# Altium PCB IPMC_MACP 1.PcbDoc
Units mm, origin at the board's own origin, x right, y up, seen from the top; angles counter-clockwise.
Board outline 120.6 x 103.58 mm, 2 copper layers (Top Layer, Bottom Layer); 134 components, 87 nets, 498 pads, 24 vias.
Unrouted connection lines stored in the file: 334.
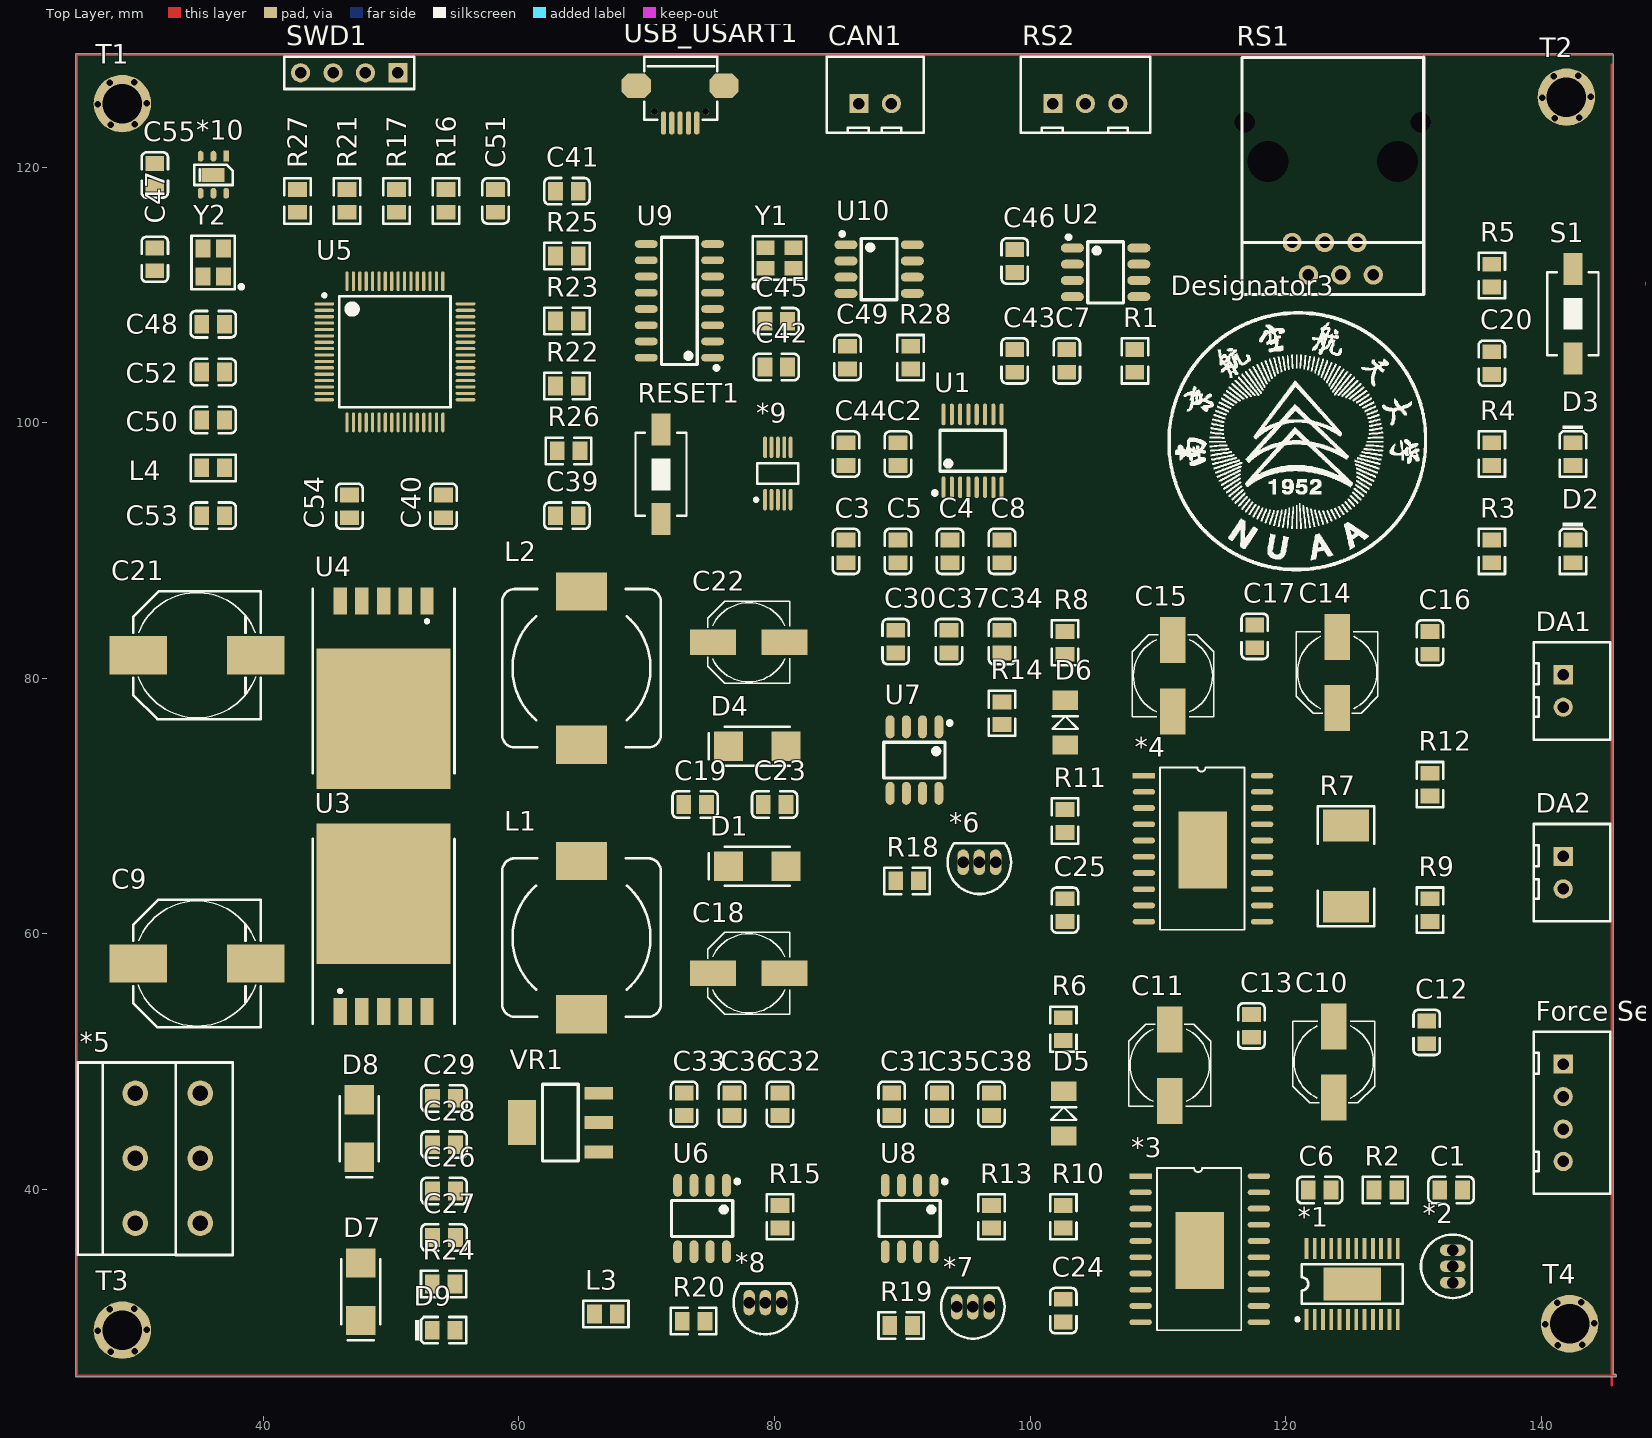
[diagram p0: Top Layer view]
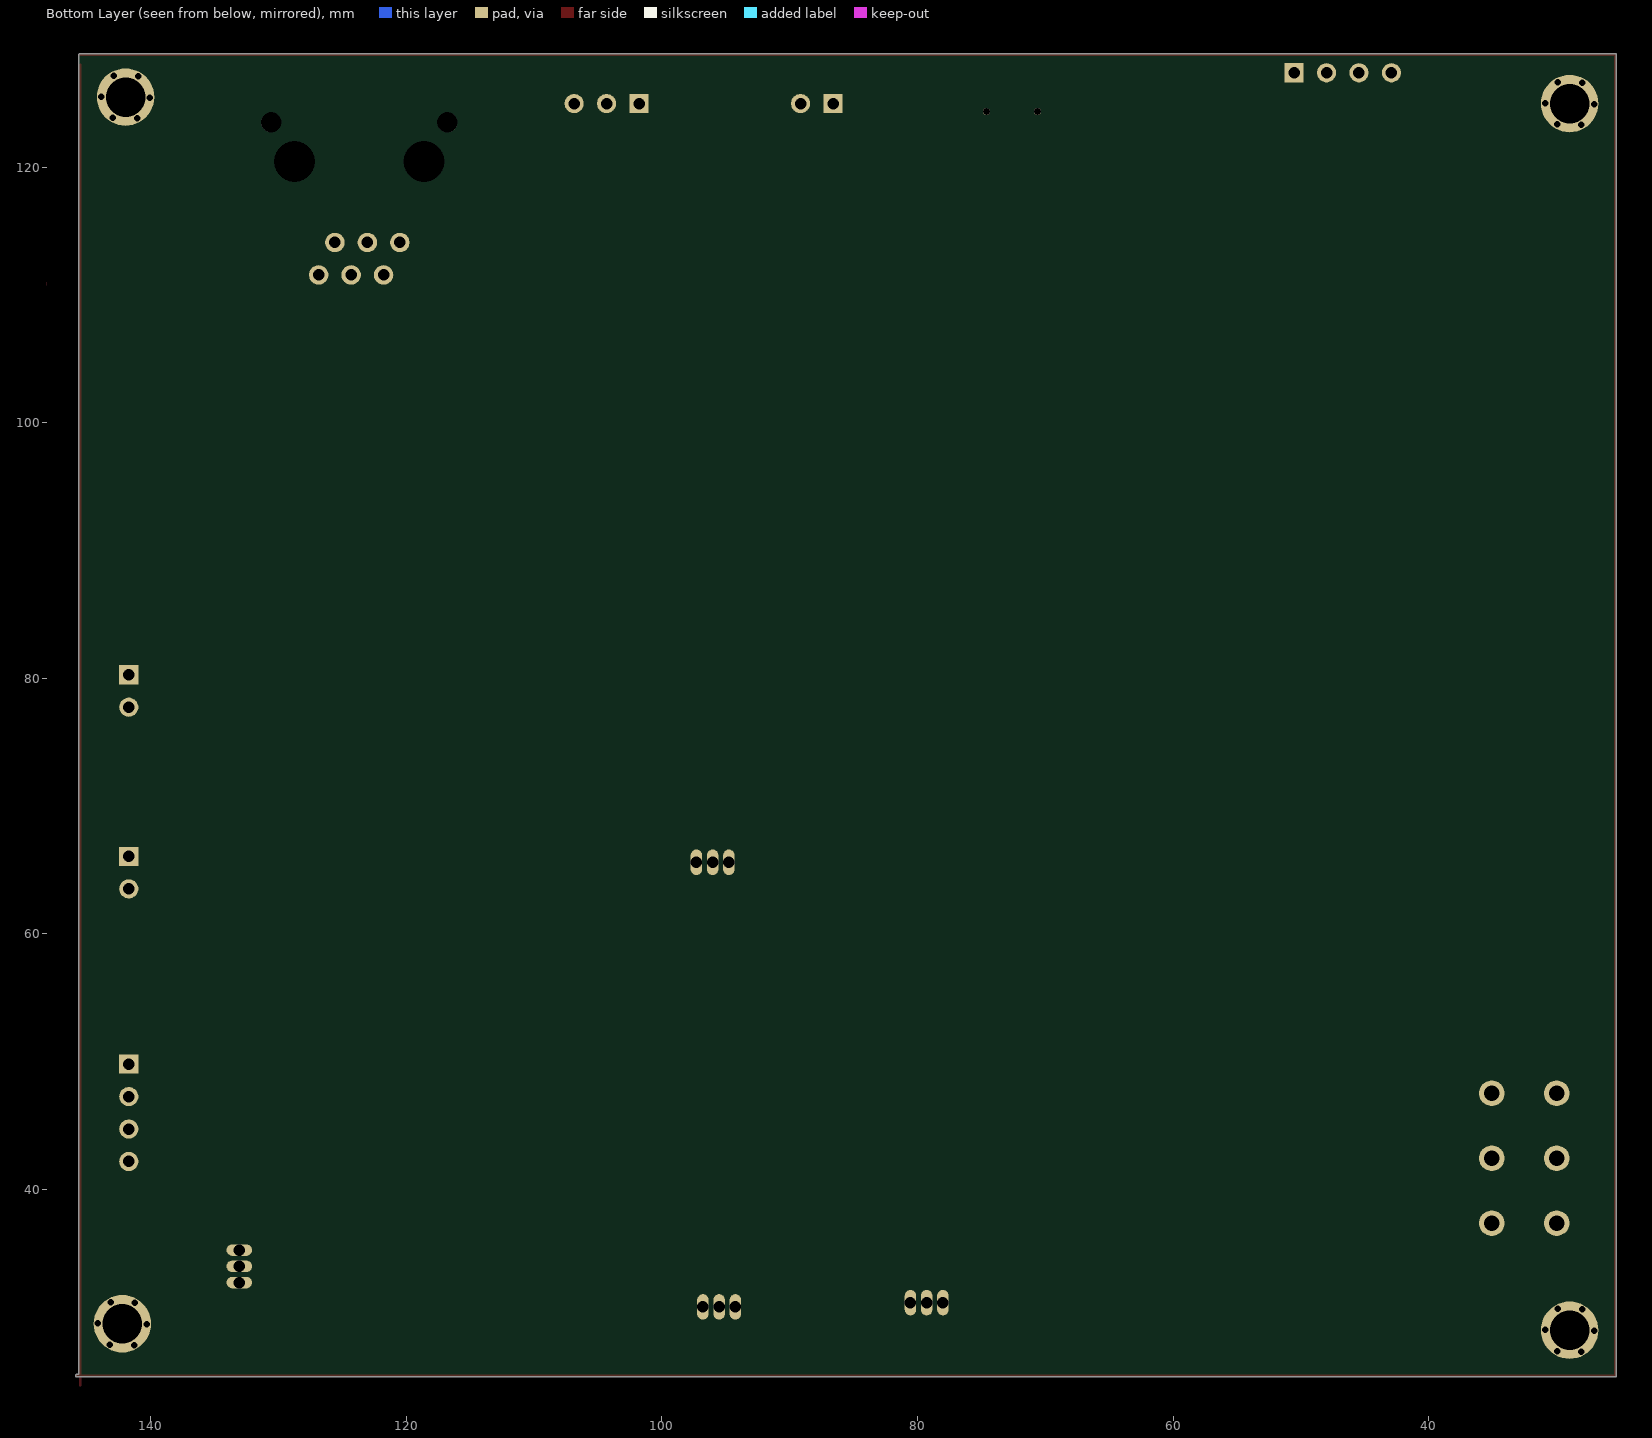
[diagram p1: Bottom Layer view, seen from below]

## Layer stack, top to bottom
Top Solder: solder mask 0.0102, Solder Resist, Dk 3.5
Top Layer: signal copper 0.0356
Dielectric 1: dielectric 0.32, FR-4, Dk 4.8
Bottom Layer: signal copper 0.0356
Bottom Solder: solder mask 0.0102, Solder Resist, Dk 3.5

## Board outline
25.4,25.298 cw(c25.4,25.4) 25.298,25.4 25.298,128.778 cw(c25.4,128.778) 25.4,128.88 145.542,128.88 cw(c145.542,128.778) 145.644,128.778 145.644,25.502 145.796,25.502 cw(c145.796,25.4) 145.898,25.4 cw(c145.796,25.4) 145.796,25.298

## Design rules (kind name [scope] priority, off if disabled: settings)
Clearance [All] p1: gap=0.178 ignorepadtopadclearanceinfootprint=FALSE
PolygonConnect [All] p1: connectstyle=Relief reliefconductorwidth=0.254 reliefentries=4 polygonreliefangle="90 Angle" airgapwidth=0.254
RoutingVias [All] p1: holewidth=0.711 width=1.27 viastyle="Through Hole" minholewidth=0.711 minwidth=1.27 maxholewidth=0.711 maxwidth=1.27
SolderMaskExpansion [All] p1: expansion=0.102
Width [All] p1: maxlimit=0.254 minlimit=0.254 preferedwidth=0.254
30 further rules are at their usual default settings.

## Components (designator, comment, footprint, x,y, rotation, side; value= is the part's Value field where it differs from the comment)
*1 "AD5722" TSSOP24P 125.211,32.58 r0 top
*2 "LM336" TO-92A 133.085,33.959 r0 top
*3 "OPA564AIDWP" HSOP20 108.661,41.019 r0 top
*4 "OPA564AIDWP" HSOP20 108.915,72.365 r0 top
*5 "KF301-3P" KF301-3P 29.972,37.338 r90 top
*6 "LM336" TO-92A 96.036,65.582 r90 top
*7 "LM336" TO-92A 95.528,30.784 r90 top
*8 "LM336" TO-92A 79.283,31.115 r90 top
*9 "ADS1115" MSOP-UN10_N 80.264,96.012 r90 top
*10 "SHT20" DFN6 35.103,117.983 r90 top
C1 "100nF" 0805_C 132.958,39.928 r180 top
C2 "100nF" 0805_C 89.669,97.536 r90 top
C3 "100nF" 0805_C 85.598,89.916 r270 top
C4 "100nF" 0805_C 93.74,89.916 r270 top
C5 "100nF" 0805_C 89.669,89.916 r270 top
C6 "100nF" 0805_C 122.671,39.928 r0 top
C7 "100nF" 0805_C 102.877,104.83 r270 top
C8 "100nF" 0805_C 97.81,89.916 r270 top
C9 "470uF/35V" C-RB-S10 34.798,57.658 r0 top
C10 "47uF/35V" C-RB-S6 123.784,49.951 r90 top
C11 "47uF/35V" C-RB-S6 110.935,49.697 r270 top
C12 "100nF" 0805_C 131.053,52.269 r270 top
C13 "100nF" 0805_C 117.337,52.777 r270 top
C14 "47uF/35V" C-RB-S6 124.038,80.441 r90 top
C15 "47uF/35V" C-RB-S6 111.189,80.187 r270 top
C16 "100nF" 0805_C 131.307,82.758 r270 top
C17 "100nF" 0805_C 117.591,83.266 r270 top
C18 "220uF/16V" C-RB-S6 77.989,56.896 r0 top
C19 "100nF" 0805_C 73.788,70.104 r180 top
C20 "100nF" 0805_C 136.144,104.648 r270 top
C21 "470uF/35V" C-RB-S10 34.798,81.788 r0 top
C22 "220uF/16V" C-RB-S6 77.989,82.804 r0 top
C23 "100nF" 0805_C 80.01,70.104 r180 top
C24 "1nF" 0805_C 102.605,30.495 r270 top
C25 "1nF" 0805_C 102.732,61.841 r90 top
C26 "10uF" 0805_C 54.132,39.846 r180 top
C27 "100nF" 0805_C 54.132,36.216 r180 top
C28 "10uF" 0805_C 54.132,43.476 r180 top
C29 "100nF" 0805_C 54.132,47.107 r180 top
C30 "100nF" 0805_C 89.492,82.854 r270 top
C31 "100nF" 0805_C 89.178,46.643 r270 top
C32 "100nF" 0805_C 80.426,46.643 r270 top
C33 "100nF" 0805_C 72.933,46.643 r270 top
C34 "100nF" 0805_C 97.81,82.854 r270 top
C35 "100nF" 0805_C 92.924,46.643 r270 top
C36 "100nF" 0805_C 76.679,46.643 r270 top
C37 "100nF" 0805_C 93.651,82.854 r270 top
C38 "100nF" 0805_C 96.977,46.643 r270 top
C39 "100nF" 0805_C 63.754,92.71 r0 top
C40 "2.2uF" 0805_C 54.102,93.445 r270 top
C41 "2.2uF" 0805_C 63.754,118.11 r0 top
C42 "100nF" 0805_C 80.137,104.349 r180 top
C43 "100nF" 0805_C 98.806,104.83 r90 top
C44 "100nF" 0805_C 85.598,97.536 r90 top
C45 "22pF" 0805_C 80.137,107.932 r180 top
C46 "22pF" 0805_C 98.806,112.649 r90 top
C47 "22pF" 0805_C 31.496,112.776 r90 top
C48 "22pF" 0805_C 36.068,107.696 r0 top
C49 "100nF" 0805_C 85.726,105.084 r270 top
C50 "100nF" 0805_C 36.068,100.203 r0 top
C51 "100nF" 0805_C 58.166,117.348 r270 top
C52 "100nF" 0805_C 36.068,103.949 r0 top
C53 "100nF" 0805_C 36.068,92.71 r180 top
C54 "100nF" 0805_C 46.736,93.445 r90 top
C55 "100nF" 0805_C 31.496,119.38 r90 top
CAN1 "Header 2" HDR2X1_B1 86.614,124.968 r0 top
D1 "1N5824" DIODE-SMA 80.899,65.278 r180 top
D2 "翠绿 0805" 0805_LED_S1 142.494,89.916 r270 top
D3 "红灯 0805" 0805_LED_S1 142.494,97.536 r270 top
D4 "1N5824" DIODE-SMA 80.899,74.676 r180 top
D5 "1N4732" DIODE-1206 102.638,44.162 r90 top
D6 "1N4732" DIODE-1206 102.765,74.767 r90 top
D7 "1N4001" DIODE-SMA 47.625,34.218 r270 top
D8 "1N4001" DIODE-SMA 47.498,46.99 r270 top
D9 "红灯 0805" 0805_LED_S1 54.102,28.956 r0 top
DA1 "Header 2" HDR2X1_B1 141.732,80.264 r270 top
DA2 "Header 2" HDR2X1_B1 141.732,66.04 r270 top
Designator3 "Comment" NUAA-LOGO 110.744,88.392 r0 top
"Force Sensor1" "Header 4" HDR4X1_B1 141.732,49.784 r270 top
L1 "33uH" L-SMD-12 64.897,59.69 r270 top
L2 "33uH" L-SMD-12 64.897,80.772 r90 top
L3 "10uH/磁珠" 0805_L 66.802,30.226 r0 top
L4 "10uH" 0805_L 36.068,96.456 r180 top
R1 "120Ω" 0805_R 108.204,104.83 r270 top
R2 "2.4KΩ" 0805_R 127.814,39.928 r0 top
R3 "1KΩ" 0805_R 136.144,89.916 r270 top
R4 "1KΩ" 0805_R 136.144,97.536 r270 top
R5 "10KΩ" 0805_R 136.144,111.506 r270 top
R6 "10KΩ" 0805_R 102.605,52.523 r90 top
R7 "10mR" 2512 124.734,65.278 r270 top
R8 "10KΩ" 0805_R 102.732,82.758 r90 top
R9 "10KΩ" 0805_R 131.307,61.841 r90 top
R10 "10KΩ" 0805_R 102.605,37.837 r270 top
R11 "10KΩ" 0805_R 102.732,68.813 r270 top
R12 "1KΩ" 0805_R 131.307,71.664 r90 top
R13 "0Ω" 0805_R 96.977,37.837 r270 top
R14 "200Ω" 0805_R 97.81,77.249 r270 top
R15 "1KΩ" 0805_R 80.426,37.837 r270 top
R16 "4.7KΩ" 0805_R 54.292,117.348 r90 top
R17 "4.7KΩ" 0805_R 50.419,117.348 r90 top
R18 "2.4KΩ" 0805_R 90.378,64.133 r0 top
R19 "2.4KΩ" 0805_R 89.913,29.335 r0 top
R20 "2.4KΩ" 0805_R 73.668,29.666 r0 top
R21 "4.7KΩ" 0805_R 46.545,117.348 r90 top
R22 "4.7KΩ" 0805_R 63.754,102.87 r0 top
R23 "4.7KΩ" 0805_R 63.754,107.95 r0 top
R24 "1KΩ" 0805_R 54.102,32.586 r0 top
R25 "4.7KΩ" 0805_R 63.754,113.03 r0 top
R26 "10KΩ" 0805_R 63.882,97.79 r180 top
R27 "10KΩ" 0805_R 42.672,117.348 r270 top
R28 "120Ω" 0805_R 90.659,105.084 r90 top
RESET1 "SW-PB" SW_PB2_A1 71.12,96.012 r180 top
RS1 "RJ11" RJ6-RJ11 123.698,114.095 r270 top
RS2 "Header 3" HDR3X1_B1 101.8,124.968 r0 top
S1 "SW-PB" SW_PB2_A1 142.494,108.458 r0 top
SWD1 "Header 4" HDR1X4 50.527,127.381 r180 top
T1 "M3铜柱螺丝孔" 螺丝孔-3MM 28.956,124.968 r0 top
T2 "M3铜柱螺丝孔" 螺丝孔-3MM 141.986,125.476 r0 top
T3 "M3铜柱螺丝孔" 螺丝孔-3MM 28.956,28.956 r0 top
T4 "M3铜柱螺丝孔" 螺丝孔-3MM 142.24,29.464 r0 top
U1 "SP3232EEY-L/TR" TSSOP-16 95.504,97.79 r0 top
U2 "SP3485EN-L/TR" SOIC-8_150mil 105.918,111.76 r270 top
U3 "LM2596S-5.0" TO-263-5 49.403,58.132 r0 top
U4 "LM2596S-5.0" TO-263-5 49.403,81.822 r180 top
U5 "STM32F405RGT6" STM-LQFP64_L 50.292,105.537 r0 top
U6 "AD620ARZ-REEL" SOIC-8_150mil 74.33,37.702 r180 top
U7 "AD620ARZ-REEL" SOIC-8_150mil 90.956,73.583 r180 top
U8 "AD620ARZ-REEL" SOIC-8_150mil 90.575,37.702 r180 top
U9 "CH340G" SOIC-16_150mil 72.563,109.526 r90 top
U10 "CAN/TJA1050T/CM" SOIC-8_150mil 88.192,112.014 r270 top
USB_USART1 "USB_M" USB_MICRO 75.152,125.095 r180 top
VR1 "AMS1117-3.3" SOT-223 63.246,45.212 r0 top
Y1 "12MHZ" SMD-3225_4P 80.398,112.879 r0 top
Y2 "25MHZ" SMD-3225_4P 36.068,112.522 r90 top

## Footprints (in the part's own frame and the unit in brackets; to place one, negate y for a bottom-side part, rotate by r counter-clockwise, add the part's x,y. Pads: shape width x height; smd on the part's side, far side on the other; paste and mask are expansions set on the pad)
0805_C [mm]
  rect 1.16x1.47 smd: 1(-0.89,0) 2(0.89,0)
  silkscreen extent -1.77,-1.04 1.77,1.04, body extent -1,-0.62 1,0.63, height 0.77
0805_L [mm]
  rect 1.16x1.47 smd: 1(-0.89,0) 2(0.89,0)
  silkscreen extent -1.77,-1.04 1.77,1.03, body extent -1.02,-0.64 1.03,0.64, height 0.6
0805_LED_S1 [mm]
  rect 1.16x1.47 smd: A(0.89,0) K(-0.89,0)
  silkscreen extent -2.25,-1.04 1.77,1.03, body extent -1.01,-0.62 1.01,0.62, height 1.1
0805_R [mm]
  rect 1.16x1.47 smd: 1(-0.89,0) 2(0.89,0)
  silkscreen extent -1.77,-1.04 1.77,1.03, body extent -1,-0.62 1,0.63, height 0.49
2512 [mm]
  rect 2.5x3.6 smd: 1(-3.175,0) 2(3.175,0)
  silkscreen extent -4.7,-2.2 4.7,2.2, body extent -3.18,-1.65 3.18,1.65, height 1.2
C-RB-S6 [mm] "贴片电解"
  rect 3.6x2 smd: 1(-2.794,0) 2(2.794,0)
  silkscreen extent -3.2,-3.2 3.2,3.2, body extent -3.15,-3.12 3.15,3.17, height 7.7
C-RB-S10 [mm] "贴片电解"
  rect 4.5x3 smd: 1(-4.6,0) 2(4.6,0)
  silkscreen extent -5,-5 5,5, body extent -4.97,-4.92 5.03,5.08, height 10
DFN6 [mm]
  rect 0.85x0.45 smd: 1(2.87,-1.981)
  rect 1.1x1.8 smd: 2(1.397,-0.965)
  oval 0.85x0.45 smd: 2(2.87,-0.981) 3(2.87,0.019) 4(-0.03,0.019) 5(-0.03,-0.981) 6(-0.03,-1.981)
  silkscreen extent 0.61,-2.48 2.2,0.52, body extent 0.19,-2.46 2.63,0.55, height 1
DIODE-1206 [mm] "玻璃封装二极管"
  rect 1.5x2 smd: 1(0,0) 2(3.5,0)
  silkscreen extent 1.25,-1 2.25,1
DIODE-SMA [mm] "贴片二极管"
  rect 2.3x2.3 smd: 1(0,0) 2(4.5,0)
  silkscreen extent -0.29,-1.52 6.06,1.52, body extent -0.67,-1.4 5.17,1.4, height 3
HDR1X4 [mm] "Connector; Header; 4 Position"
  rect 1.5x1.5 hole 0.9: 1(0,0)
  round 1.5 hole 0.9: 2(2.54,0) 3(5.08,0) 4(7.62,0)
  silkscreen extent -1.27,-1.27 8.89,1.27
HDR2X1_B1 [mm] "Connector; Header; 4 Position"
  rect 1.5x1.5 hole 0.9: 1(0,0)
  round 1.5 hole 0.9: 2(2.54,0)
  silkscreen extent -2.54,-2.29 5.08,3.68, body extent -2.41,-2.16 5.08,3.56, height 1.5
HDR3X1_B1 [mm] "Connector; Header; 3 Position"
  rect 1.5x1.5 hole 0.9: 1(0,0)
  round 1.5 hole 0.9: 2(2.54,0) 3(5.08,0)
  silkscreen extent -2.54,-2.29 7.62,3.68, body extent -2.54,-2.29 7.62,3.68, height 1.5
HDR4X1_B1 [mm] "Connector; Header; 4 Position"
  rect 1.5x1.5 hole 0.9: 1(0,0)
  round 1.5 hole 0.9: 2(2.54,0) 3(5.08,0) 4(7.62,0)
  silkscreen extent -2.54,-2.29 10.16,3.68, body extent -2.41,-2.16 10.03,3.56, height 1.5
HSOP20 [mm]
  rect 1.75x0.45 smd: 1(0,0)
  oval 1.75x0.45 smd: 2(0,-1.27) 3(0,-2.54) 4(0,-3.81) 5(0,-5.08) 6(0,-6.35) 7(0,-7.62) 8(0,-8.89) 9(0,-10.16) 10(0,-11.43) 11(9.254,-11.43) 12(9.254,-10.16) 13(9.254,-8.89) 14(9.254,-7.62) 15(9.254,-6.35) 16(9.254,-5.08) 17(9.254,-3.81) 18(9.254,-2.54) 19(9.254,-1.27) 20(9.254,0)
  rect 3.8x6 smd: ""(4.623,-5.817)
  silkscreen extent 1.27,-12.06 7.87,0.64, body extent 1.27,-12.06 7.87,0.64, height 0.25
KF301-3P [mm] "蓝色端子"
  round 2 hole 1.2: 1(0,0) 1(0,-5.08) 2(5.08,-5.08) 2(5.08,0) 3(10.16,-5.08) 3(10.16,0)
  silkscreen extent -2.49,-7.62 12.57,4.52
L-SMD-12 [mm] "贴片电感12*12"
  rect 3x4 smd: 1(-6,0) 2(6,0)
  silkscreen extent -6.2,-6.2 6.2,6.2, body extent -6.2,-6.22 6.2,6.17, height 2.5
MSOP-UN10_N [mm] "TSSOP"
  oval 1.7x0.3 smd: 1(-2.05,1) 2(-2.05,0.5) 3(-2.05,0) 4(-2.05,-0.5) 5(-2.05,-1) 6(2.05,-1) 7(2.05,-0.5) 8(2.05,0) 9(2.05,0.5) 10(2.05,1)
  silkscreen extent -2.17,-1.6 0.8,1.82, body extent -1.6,-1.6 1.6,1.6, height 1.1
NUAA-LOGO [mm] "2*2cm"
  silkscreen extent 0.03,0.03 20.32,20.32
RJ6-RJ11 [mil]
  round 60 hole 35.43: 1(100,125) 2(0,75) 3(100,25) 4(0,-25) 5(100,-75) 6(0,-125)
  round 60 hole 125.98: 7(-250,200) 8(-250,-200)
  round 60 hole 62.99: 9(-370,271.65) 10(-370,-271.65)
  silkscreen extent -572,-280 160,280, body extent -570,-280 160,280, height 512
SMD-3225_4P [mm]
  rect 1.4x1.15 smd: 1(-1.1,-0.8) 2(1.1,-0.8) 3(1.1,0.8) 4(-1.1,0.8)
  silkscreen extent -2.1,-2.35 2.1,1.7, body extent -1.6,-1.25 1.6,1.25, height 0.61
SOIC-8_150mil [mm]
  oval 0.7x1.8 smd: 1(-1.905,-2.6) 2(-0.635,-2.6) 3(0.635,-2.6) 4(1.905,-2.6) 5(1.905,2.6) 6(0.635,2.6) 7(-0.635,2.6) 8(-1.905,2.6)
  silkscreen extent -2.9,-3.05 2.4,1.4
SOIC-16_150mil [mm]
  oval 0.6x1.8 smd: 1(-4.445,-2.6) 2(-3.175,-2.6) 3(-1.905,-2.6) 4(-0.635,-2.6) 5(0.635,-2.6) 6(1.905,-2.6) 7(3.175,-2.6) 8(4.445,-2.6) 9(4.445,2.6) 10(3.175,2.6) 11(1.905,2.6) 12(0.635,2.6) 13(-0.635,2.6) 14(-1.905,2.6) 15(-3.175,2.6) 16(-4.445,2.6)
  silkscreen extent -5.4,-3.05 4.97,1.4
SOT-223 [mm]
  rect 2.2x1 smd: 1(3,-2.3) 2(3,0) 3(3,2.3)
  rect 2.2x3.5 smd: 2(-3,0)
  silkscreen extent -1.4,-3 1.4,3, body extent -3.49,-3.24 3.49,3.24, height 1.64
STM-LQFP64_L [mm] "Thin QFP, 64-Leads, Body 10x10mm, Pitch 0.5mm, IPC High Density"
  oval 1.55x0.25 smd: 1(-5.525,3.75) 2(-5.525,3.25) 3(-5.525,2.75) 4(-5.525,2.25) 5(-5.525,1.75) 6(-5.525,1.25) 7(-5.525,0.75) 8(-5.525,0.25) 9(-5.525,-0.25) 10(-5.525,-0.75) 11(-5.525,-1.25) 12(-5.525,-1.75) 13(-5.525,-2.25) 14(-5.525,-2.75) 15(-5.525,-3.25) 16(-5.525,-3.75) 33(5.525,-3.75) 34(5.525,-3.25) 35(5.525,-2.75) 36(5.525,-2.25) 37(5.525,-1.75) 38(5.525,-1.25) 39(5.525,-0.75) 40(5.525,-0.25) 41(5.525,0.25) 42(5.525,0.75) 43(5.525,1.25) 44(5.525,1.75) 45(5.525,2.25) 46(5.525,2.75) 47(5.525,3.25) 48(5.525,3.75)
  oval 0.25x1.55 smd: 17(-3.75,-5.525) 18(-3.25,-5.525) 19(-2.75,-5.525) 20(-2.25,-5.525) 21(-1.75,-5.525) 22(-1.25,-5.525) 23(-0.75,-5.525) 24(-0.25,-5.525) 25(0.25,-5.525) 26(0.75,-5.525) 27(1.25,-5.525) 28(1.75,-5.525) 29(2.25,-5.525) 30(2.75,-5.525) 31(3.25,-5.525) 32(3.75,-5.525) 49(3.75,5.525) 50(3.25,5.525) 51(2.75,5.525) 52(2.25,5.525) 53(1.75,5.525) 54(1.25,5.525) 55(0.75,5.525) 56(0.25,5.525) 57(-0.25,5.525) 58(-0.75,5.525) 59(-1.25,5.525) 60(-1.75,5.525) 61(-2.25,5.525) 62(-2.75,5.525) 63(-3.25,5.525) 64(-3.75,5.525)
  silkscreen extent -5.65,-4.35 4.35,4.55, body extent -5,-5 5,5, height 1.6
SW_PB2_A1 [mm]
  rect 1.5x2.5 smd: 1(0,3.556) 2(0,-3.444)
  silkscreen extent -2,-3.19 2,3.31, body extent -2.03,-3.18 2.03,3.3, height 1.2
TO-92A [mm]
  oval 2x0.9 hole 0.9: 1(0,-1.27) 2(0,0) 3(0,1.27)
  silkscreen extent -2.48,-2.48 1.5,2.48
TO-263-5 [mm] "贴片LM2596"
  rect 1.05x2.1 smd: 1(-3.4,-4.225) 2(-1.7,-4.225) 3(0,-4.225) 4(1.7,-4.225) 5(3.4,-4.225)
  rect 10.5x11 smd: 6(0,4.987)
  silkscreen extent -5.55,-5.18 5.55,9.28, body extent -5.33,-4.7 5.33,10.29, height 3
TSSOP24P [mm] "Shrink Small Outline; 24 Leads; Body Width 4.4 mm; Pitch 0.65 mm"
  rect 0.3x1.65 smd: 1(-3.575,-2.775) 2(-2.925,-2.775) 3(-2.275,-2.775) 4(-1.625,-2.775) 5(-0.975,-2.775) 6(-0.325,-2.775) 7(0.325,-2.775) 8(0.975,-2.775) 9(1.625,-2.775) 10(2.275,-2.775) 11(2.925,-2.775) 12(3.575,-2.775) 13(3.575,2.775) 14(2.925,2.775) 15(2.275,2.775) 16(1.625,2.775) 17(0.975,2.775) 18(0.325,2.775) 19(-0.325,2.775) 20(-0.975,2.775) 21(-1.625,2.775) 22(-2.275,2.775) 23(-2.925,2.775) 24(-3.575,2.775)
  rect 4.5x2.6 smd: 25(0,0)
  silkscreen extent -4.4,-2.9 3.95,1.55
TSSOP-16 [mm]
  oval 0.32x1.7 smd: 1(-2.275,-2.85) 2(-1.625,-2.85) 3(-0.975,-2.85) 4(-0.325,-2.85) 5(0.325,-2.85) 6(0.975,-2.85) 7(1.625,-2.85) 8(2.275,-2.85) 9(2.275,2.85) 10(1.625,2.85) 11(0.975,2.85) 12(0.325,2.85) 13(-0.325,2.85) 14(-0.975,2.85) 15(-1.625,2.85) 16(-2.275,2.85)
  silkscreen extent -3.1,-3.45 2.55,1.6
USB_MICRO [mm] "USB方孔"
  oct 0.4x1.8 smd: 1(1.24,1.651) 2(1.89,1.651) 3(2.54,1.651) 4(3.19,1.651) 5(3.84,1.651)
  oct 2.286x1.9 smd: 6(5.969,-1.27) 7(-0.889,-1.27)
  round 0.54 hole 0.54: ""(0.54,0.753) ""(4.54,0.753)
  silkscreen extent -0.38,-3.56 5.33,1.4, body extent -0.43,-3.61 5.38,1.47, height 1.85
螺丝孔-3MM [mm]
  round 4.5 hole 3.1: 1(0,0)

## Part data
*1: "双极性DAC"
*2 *6 *7 *8: "基准电压芯片2.5/5V"
*3 *4: "PAD on Bottom"
*5: "蓝色端子"
C1 C2 C3 C4 C5 C6 C7 C8 C12 C13 C16 C17 C19 C20 C23 C27 C29 C30 C31 C32 C33 C34 C35 C36 C37 C38 C39 C42 C43 C44 C49 C50 C51 C52 C53 C54 C55: library part "0805 100nF(104) 10% 50V", "贴片电容", Package=0805, SuppliersPartNumber=C49678, ComponentLink1Description=供应, ComponentLink1URL=http://www.szlcsc.com/product/details_50686.html, Supplier=LC
C9 C10 C11 C14 C15 C18 C21 C22: library part "Cap Pol", "极性电解电容", LatestRevisionDate=17-Jul-2002, LatestRevisionNote="Re-released for DXP Platform.", PackageReference=RB7.6-15, Published=8-Jun-2000, Publisher="Altium Limited"
C24 C25: library part "0805 1nF (102) 10% 50V", "贴片电容", Package=0805, SuppliersPartNumber=C51210, ComponentLink1Description=供应, ComponentLink1URL=http://www.szlcsc.com/product/details_52223.html, Supplier=LC
C26 C28: library part "0805 10uF (106) 10% 25V", "贴片电容", Package=0805, SuppliersPartNumber=C15850, ComponentLink1Description=供应, ComponentLink1URL=http://www.szlcsc.com/product/details_16532.html, Supplier=LC
C40 C41: library part "0805 2.2uF (225) 20% 50V", "贴片电容", Package=0805, SuppliersPartNumber=C49217, ComponentLink1Description=供应, ComponentLink1URL=http://www.szlcsc.com/product/details_50225.html, Supplier=LC
C45 C46 C47 C48: library part "0805 22pF (220) 5% 50V", "贴片电容", Package=0805, SuppliersPartNumber=C1804, ComponentLink1Description=供应, ComponentLink1URL=http://www.szlcsc.com/product/details_2156.html, Supplier=LC
CAN1 DA1 DA2 RS2: "接插件", LatestRevisionDate=17-Jul-2002, LatestRevisionNote="Re-released for DXP Platform.", Publisher="Altium Limited"
D1 D4 D7 D8: library part Diode, "二极管", PackageDocument=Sep-1996, Code_JEDEC=DO-214-AB, LatestRevisionDate=17-Jul-2002, LatestRevisionNote="Re-released for DXP Platform.", PackageReference=SMC, Published=8-Jun-2000, Publisher="Altium Limited"
D2: library part "0805 翠绿", "发光二极管", Package=0805, SuppliersPartNumber=C2297, ComponentLink1Description=供应, ComponentLink1URL=http://www.szlcsc.com/product/details_2670.html, Supplier=LC
D3 D9: library part "0805 红灯", "发光二极管", Package=0805, SuppliersPartNumber=C2295, ComponentLink1Description=供应, ComponentLink1URL=http://www.szlcsc.com/product/details_2668.html, Supplier=LC
D5 D6: library part Diode-Z, "稳压二极管", Code_JEDEC=DO-214-AA, LatestRevisionDate=17-Jul-2002, LatestRevisionNote="Re-released for DXP Platform.", PackageReference=SMB, Published=8-Jun-2000, Publisher="Altium Limited"
"Force Sensor1" SWD1: "Header, 4-Pin", LatestRevisionDate=17-Jul-2002, LatestRevisionNote="Re-released for DXP Platform.", Publisher="Altium Limited"
L1 L2: library part Inductor, "电感", Code_IEC=1005, Code_JEITA=0402, LatestRevisionDate=17-Jul-2002, LatestRevisionNote="Re-released for DXP Platform.", PackageReference=0402-A, Published=8-Jun-2000, Publisher="Altium Limited"
L3 L4: library part "0805 10uH 10%", "贴片电感", Package=0805, SuppliersPartNumber=C1046, ComponentLink1Description=供应, ComponentLink1URL=http://www.szlcsc.com/product/details_1398.html, Supplier=LC
R1 R28: library part "0805 120Ω (1200) 1%", "贴片电阻", Package=0805, SuppliersPartNumber=C17437, ComponentLink1Description=供应, ComponentLink1URL=http://www.szlcsc.com/product/details_18125.html, Supplier=LC
R2 R18 R19 R20: library part "0805 2.4KΩ (2401) 1%", "贴片电阻", Package=0805, SuppliersPartNumber=C17526, ComponentLink1Description=供应, ComponentLink1URL=http://www.szlcsc.com/product/details_18214.html, Supplier=LC
R3 R4 R15 R24: library part "0805 1KΩ (1001) 1%", "贴片电阻", Package=0805, SuppliersPartNumber=C17513, ComponentLink1Description=供应, ComponentLink1URL=http://www.szlcsc.com/product/details_18201.html, Supplier=LC
R5 R6 R8 R10 R11 R26 R27: library part "0805 10KΩ (1002) 1%", "贴片电阻", Package=0805, SuppliersPartNumber=C17414, ComponentLink1Description=供应, ComponentLink1URL=http://www.szlcsc.com/product/details_18102.html, Supplier=LC
R7: library part Res1, "贴片电阻", LatestRevisionDate=17-Jul-2002, LatestRevisionNote="Re-released for DXP Platform.", PackageReference=AXIAL-0.4, Published=8-Jun-2000, Publisher="Altium Limited"
R9 R12: library part "0805 20KΩ (2002) 1%", "贴片电阻", Package=0805, SuppliersPartNumber=C4328, ComponentLink1Description=供应, ComponentLink1URL=http://www.szlcsc.com/product/details_4735.html, Supplier=LC
R13: library part "0805 0Ω (0R0) 1%", "贴片电阻", Package=0805, SuppliersPartNumber=C17477, ComponentLink1Description=供应, ComponentLink1URL=http://www.szlcsc.com/product/details_18165.html, Supplier=LC
R14: library part "0805 200Ω (2000) 1%", "贴片电阻", Package=0805, SuppliersPartNumber=C17540, ComponentLink1Description=供应, ComponentLink1URL=http://www.szlcsc.com/product/details_18228.html, Supplier=LC
R16 R17 R21 R22 R23 R25: library part "0805 4.7KΩ (4701) 1%", "贴片电阻", Package=0805, SuppliersPartNumber=C17673, ComponentLink1Description=供应, ComponentLink1URL=http://www.szlcsc.com/product/details_18361.html, Supplier=LC
RESET1 S1: "微动开关", LatestRevisionDate=17-Jul-2002, LatestRevisionNote="Re-released for DXP Platform.", PackageReference=SPST-2, Published=24-Mar-1999, Publisher="Altium Limited"
U1: "RS232", Package=TSSOP-16, SuppliersPartNumber=C13482, ComponentLink1Description=供应, ComponentLink1URL=http://www.szlcsc.com/product/details_14131.html, Supplier=LC
U2: "RS-485/RS-422", Package=SOIC-8, SuppliersPartNumber=C8963, ComponentLink1Description=供应, ComponentLink1URL=http://www.szlcsc.com/product/details_9482.html, Supplier=LC
U3 U4: "5V稳压芯片", ComponentLink1Description="Manufacturer Link", ComponentLink1URL=http://www.national.com/, ComponentLink2Description=Datasheet, ComponentLink2URL=http://www.national.com/ds.cgi/LM/LM2596.pdf, ComponentLink3Description="URL Link1", ComponentLink3URL=http://www.national.com/pf/LM/LM2596.html, DatasheetVersion=Dec-1997, Note="Tab is connected to GND", PackageDescription="D2-PAK; 5 Leads; Body 14.4 (inc. leads) x 10.4 mm (LxW max)", PackageReference=TS5B, Published=15-Apr-2002, Publisher="Altium Limited"
U5: "ARM Cortex-M4 32-bit MCU+FPU, 210 DMIPS, 1024 kB Flash, 192 kB Internal RAM, 51 I/Os, 64-pin LQFP, -40 to 85 degC, Tray", I/Os (High Current)=51, Manufacturer=STMicroelectronics, Operating Frequency(F) (Processor speed) (MHz)=168, Supplier Part Number 1=497-11767-ND, Supply Voltage(Vcc) max (V)=3.6, Supply Voltage(Vcc) min (V)=1.8, ComponentLink1Description="Manufacturer URL", ComponentLink1URL=http://www.st.com/web/en/home.html, ComponentLink2Description=Datasheet, ComponentLink2URL=http://www.st.com/st-web-ui/static/active/en/resource/technical/document/datasheet/DM00037051.pdf, ComponentLink3Description="Package Specification", ComponentLink3URL=http://www.st.com/st-web-ui/static/active/en/resource/technical/document/datasheet/DM00037051.pdf, Core="ARM Cortex-M4", D/A Converter=2x12-bit, DatasheetVersion="Rev. 4", FLASH Size (Prog) (kB)=1024, Internal RAM Size (kB)=192, Mounting Technology="Surface Mount", PackageDescription="64-Pin Low Profile Quad Flat Package, 10 x 10 mm Body, 0.5 mm Pitch", PackageReference=LQFP64, PackageVersion="Rev. 4, 06/2013", Packing=Tray, PartNumber=STM32F405RGT6, Supplier 1=Digi-Key, Supplier 2=Farnell, Supplier 3=Newark, Supplier 4=Mouser, Supplier Part Number 2=2064363, Supplier Part Number 3=73T2329, Supplier Part Number 4=511-STM32F405RGT6
U6 U7 U8: "仪放", Package=SOIC-8_150mil, SuppliersPartNumber=C9675, ComponentLink1Description=供应, ComponentLink1URL=http://www.szlcsc.com/product/details_10205.html, Supplier=LC
U9: "USB", Package=SOIC-16_150mil, SuppliersPartNumber=C14267, ComponentLink1Description=供应, ComponentLink1URL=http://www.szlcsc.com/product/details_14927.html, Supplier=LC
U10: "CAN", Package=SOIC-8_150mil, SuppliersPartNumber=C6952, ComponentLink1Description=供应, ComponentLink1URL=http://www.szlcsc.com/product/details_7424.html, Supplier=LC
USB_USART1: "MicroUSB接口"
VR1: library part "SOT-223 AMS1117-3.3", "低压差线性稳压(LDO)", Package=SOT-223, SuppliersPartNumber=C6186, ComponentLink1Description=供应, ComponentLink1URL=http://www.szlcsc.com/product/details_6652.html, Supplier=LC
Y1: library part "SMD-3225_4P  12MHZ 20PF 10PPM", "贴片晶振", Package=SMD-3225_4P, SuppliersPartNumber=C9002, ComponentLink1Description=供应, ComponentLink1URL=http://www.szlcsc.com/product/details_9522.html, Supplier=LC
Y2: library part "SMD-3225_4P  25MHZ 12PF 10PPM", "贴片晶振", Package=SMD-3225_4P, SuppliersPartNumber=C9006, ComponentLink1Description=供应, ComponentLink1URL=http://www.szlcsc.com/product/details_9526.html, Supplier=LC

## Via types
v1: diameter 0.508, hole 0.508, Top Layer to Bottom Layer, 24 vias

## Nets (pads, with @x,y where several pads share a name; then routed paths per layer and width w, separated by ;. In a path a pad name is that pad's centre, name@x,y a point inside that pad or via, vN(x,y) a via of type N, cw(c..) or ccw(c..) an arc to the next point about the centre after c; other vN are vias at no path point)
2.5V: *1.17 *2.2 C6.2 R2.1
3.3V: *10.5 C28.2 C29.2 C50.1 C51.1 C52.1 C54.1 C55.1 L4.2 R3.1 R4.1 R5.1 R16.2 R17.2 R21.2 R22.2 R23.2 R25.2 R26.1 VR1.2
485-A: R1.1 RS2.1 U2.6
485-B: R1.2 RS2.2 U2.7
+5V: "Force Sensor1.3" *1.5 *1.14 *9.8 C1.2 C3.1 C7.2 C18.1 C19.2 C26.2 C27.2 C36.2 C37.2 C38.2 C42.2 C44.1 C49.2 L1.2 R2.2 R18.2 R19.2 R20.2 R24.1 SWD1.1 U1.16 U2.8 U3.4 U6.7 U7.7 U8.7 U9.16 U10.3 USB_USART1.1 VR1.3
+12: *1.24 *3.2 *3.17 *3.18 *3.19 *4.2 *4.17 *4.18 *4.19 *5.1 C9.1 C10.1 C12.2 C14.1 C16.2 C21.1 D7.2 R6.2 R8.2 U3.1 U4.1
-5V: C21.2 C22.2 C23.1 C33.2 C34.2 C35.2 D4.1 U4.3 U4.5 U4.6 U6.4 U7.4 U8.4
-12: *1.1 *3.1 *3.10 *3.11 *3.13 *3.14 *3.20 *4.1 *4.10 *4.11 *4.13 *4.14 *4.20 *5.3 C11.2 C13.2 C15.2 C17.2 C24.1 C25.1 D5.1 D6.1 D8.1 R10.1 R11.1
AD-Vout0: *9.5 U8.6
CANH: CAN1.1 R28.1 U10.7
CANL: CAN1.2 R28.2 U10.6
CANRX: U5.44 U10.4
CANTX: U5.45 U10.1
"CH340 D+": U9.5 USB_USART1.3
"CH340 D-": U9.6 USB_USART1.2
Current0: *9.4 U7.6
DA0: *1.3 *4.5
DA1: *1.23 *3.5
DA_CLR#: *1.11 U5.29
DA_LDAC#: *1.10 U5.33
DA_SCLK: *1.8 R22.1 U5.34
DA_SDIN: *1.9 R25.1 U5.36
DA_SDO: *1.16 R23.1 U5.35
DA_SYNC#: *1.7 U5.30
Force0: *9.6 U6.6
Force+: "Force Sensor1.1" U6.3
Force-: "Force Sensor1.2" U6.2
GND: *1.15 *5.2 *10.2 C1.1 C3.2 C5.2 C7.1 C8.2 C9.2 C18.2 C19.1 C20.2 C22.1 C23.2 C26.1 C27.1 C28.1 C29.1 C39.2 C40.2 C41.2 C42.1 C43.2 C45.1 C46.1 C47.1 C48.1 C49.1 C50.2 C51.2 C52.2 C53.2 C54.2 C55.2 D1.1 D7.1 D8.2 D9.K L2.2 L3.1 R27.1 RESET1.2 RS1.4 RS2.3 S1.2 SWD1.3 U1.15 U2.5 U3.3 U3.5 U3.6 U4.4 U5.12 U5.18 U5.63 U9.1 U10.2 U10.8 USB_USART1.5 VR1.1
KEY1: C20.1 R5.2 S1.1 U5.27
LED_G: D2.K U5.9
LED_R: D3.K U5.8
Net*3_4: *3.4 *3.7 D5.2 R6.1
Net*3_9: *3.9 C24.2 R10.2
Net*4_4: *4.4 *4.7 D6.2 R8.1
Net*4_6: *4.6 *4.15 *4.16 R7.1 U7.3
Net*4_9: *4.9 C25.2 R11.2
Net*6_2: *6.2 C30.2 R18.1 U7.5
Net*7_2: *7.2 C31.2 R19.1 U8.5
Net*8_2: *8.2 C32.2 R20.1 U6.5
NetC2_1: C2.1 U1.3
NetC2_2: C2.2 U1.1
NetC4_1: C4.1 U1.4
NetC4_2: C4.2 U1.5
NetC5_1: C5.1 U1.2
NetC8_1: C8.1 U1.6
NetC40_1: C40.1 U5.31
NetC41_1: C41.1 U5.47
NetC43_1: C43.1 U9.4
NetC45_2: C45.2 U9.7 Y1.1
NetC46_2: C46.2 U9.8 Y1.3
NetC53_1: C53.1 L4.1 U5.13
NetD1_2: D1.2 L1.1 U3.2
NetD2_A: D2.A R3.2
NetD3_A: D3.A R4.2
NetD4_2: D4.2 L2.1 U4.2
NetD9_A: D9.A R24.2
NetR9_2: R9.2 R12.1 U8.3
NetR13_1: R13.1 U8.1
NetR13_2: R13.2 U8.8
NetR14_1: R14.1 U7.1
NetR14_2: R14.2 U7.8
NetR15_1: R15.1 U6.1
NetR15_2: R15.2 U6.8
NetR27_2: R27.2 U5.60
NetU5_1: U5.1 U5.19 U5.32 U5.48 U5.64
NRST: C39.1 R26.2 RESET1.1 U5.7
OSC32_IN: U5.3
OSC32_OUT: U5.4
OSC_IN: C47.2 U5.5 Y2.3
OSC_OUT: C48.2 U5.6 Y2.1
PC12: U2.2 U2.3 U5.53
RDY0: *9.2 R16.1 U5.57
RXD: U5.43 U9.2
RXD2: U1.12 U5.17
RXD2_In: RS1.5 U1.13
RXD3: U2.1 U5.52
SCL: *9.10 *10.6 R17.1 U5.58
SDA: *9.9 *10.1 R21.1 U5.59
SGND: "Force Sensor1.4" *1.18 *1.19 *1.20 *1.21 *2.1 *6.1 *7.1 *8.1 *9.1 *9.3 *9.7 C6.1 C10.2 C11.1 C12.1 C13.1 C14.2 C15.1 C16.1 C17.1 C30.1 C31.1 C32.1 C33.1 C34.1 C35.1 C36.1 C37.1 C38.1 C44.2 DA1.2 DA2.2 L3.2 R12.2 U8.2
SWCLK: SWD1.4 U5.49
SWDIO: SWD1.2 U5.46
TXD: U5.42 U9.3
TXD2: U1.11 U5.16
TXD2_Out: RS1.3 U1.14
TXD3: U2.4 U5.51
Vout0: DA1.1 R7.2 R9.1 U7.2
Vout1: *3.6 *3.15 *3.16 DA2.1
pads on no net: *1.2 *1.4 *1.6 *1.12 *1.13 *1.22 *1.25 *2.3 *3. *3.3 *3.8 *3.12 *4. *4.3 *4.8 *4.12 *6.3 *7.3 *8.3 *10.3 *10.4 RS1.1 RS1.2 RS1.6 RS1.7 RS1.8 RS1.9 RS1.10 T1.1 T2.1 T3.1 T4.1 U1.7 U1.8 U1.9 U1.10 U5.2 U5.10 U5.11 U5.14 U5.15 U5.20 U5.21 U5.22 U5.23 U5.24 U5.25 U5.26 U5.28 U5.37 U5.38 U5.39 U5.40 U5.41 U5.50 U5.54 U5.55 U5.56 U5.61 U5.62 U9.9 U9.10 U9.11 U9.12 U9.13 U9.14 U9.15 U10.5 USB_USART1. USB_USART1.4 USB_USART1.6 USB_USART1.7 Y1.2 Y1.4 Y2.2 Y2.4
copper on no net: | length 447.3
  Top Layer w0.203: 145.542,24.638 145.542,128.016 ; 145.542,128.778 25.4,128.778 25.4,25.4 145.796,25.4
  other v1: 28.036,27.282 29.946,27.322 141.32,27.79 143.23,27.83 27.046,28.916 30.866,28.996 140.33,29.424 144.15,29.504 27.966,30.59 29.876,30.63 141.25,31.098 143.16,31.138 28.036,123.294 29.946,123.334 141.066,123.802 142.976,123.842 27.046,124.928 30.866,125.008 140.076,125.436 143.896,125.516 27.966,126.602 29.876,126.642 140.996,127.11 142.906,127.15

## Other copper
Top Layer:
  text "长:120mm / 宽:103mm" at 148.082,103.378 h5